# Altium PCB pcb.PcbDoc
Units mm, origin at the board's own origin, x right, y up, seen from the top; angles counter-clockwise.
Board outline 45.47 x 50.43 mm, 2 copper layers (Top Layer, Bottom Layer); 18 components, 17 nets, 85 pads, 6 vias.
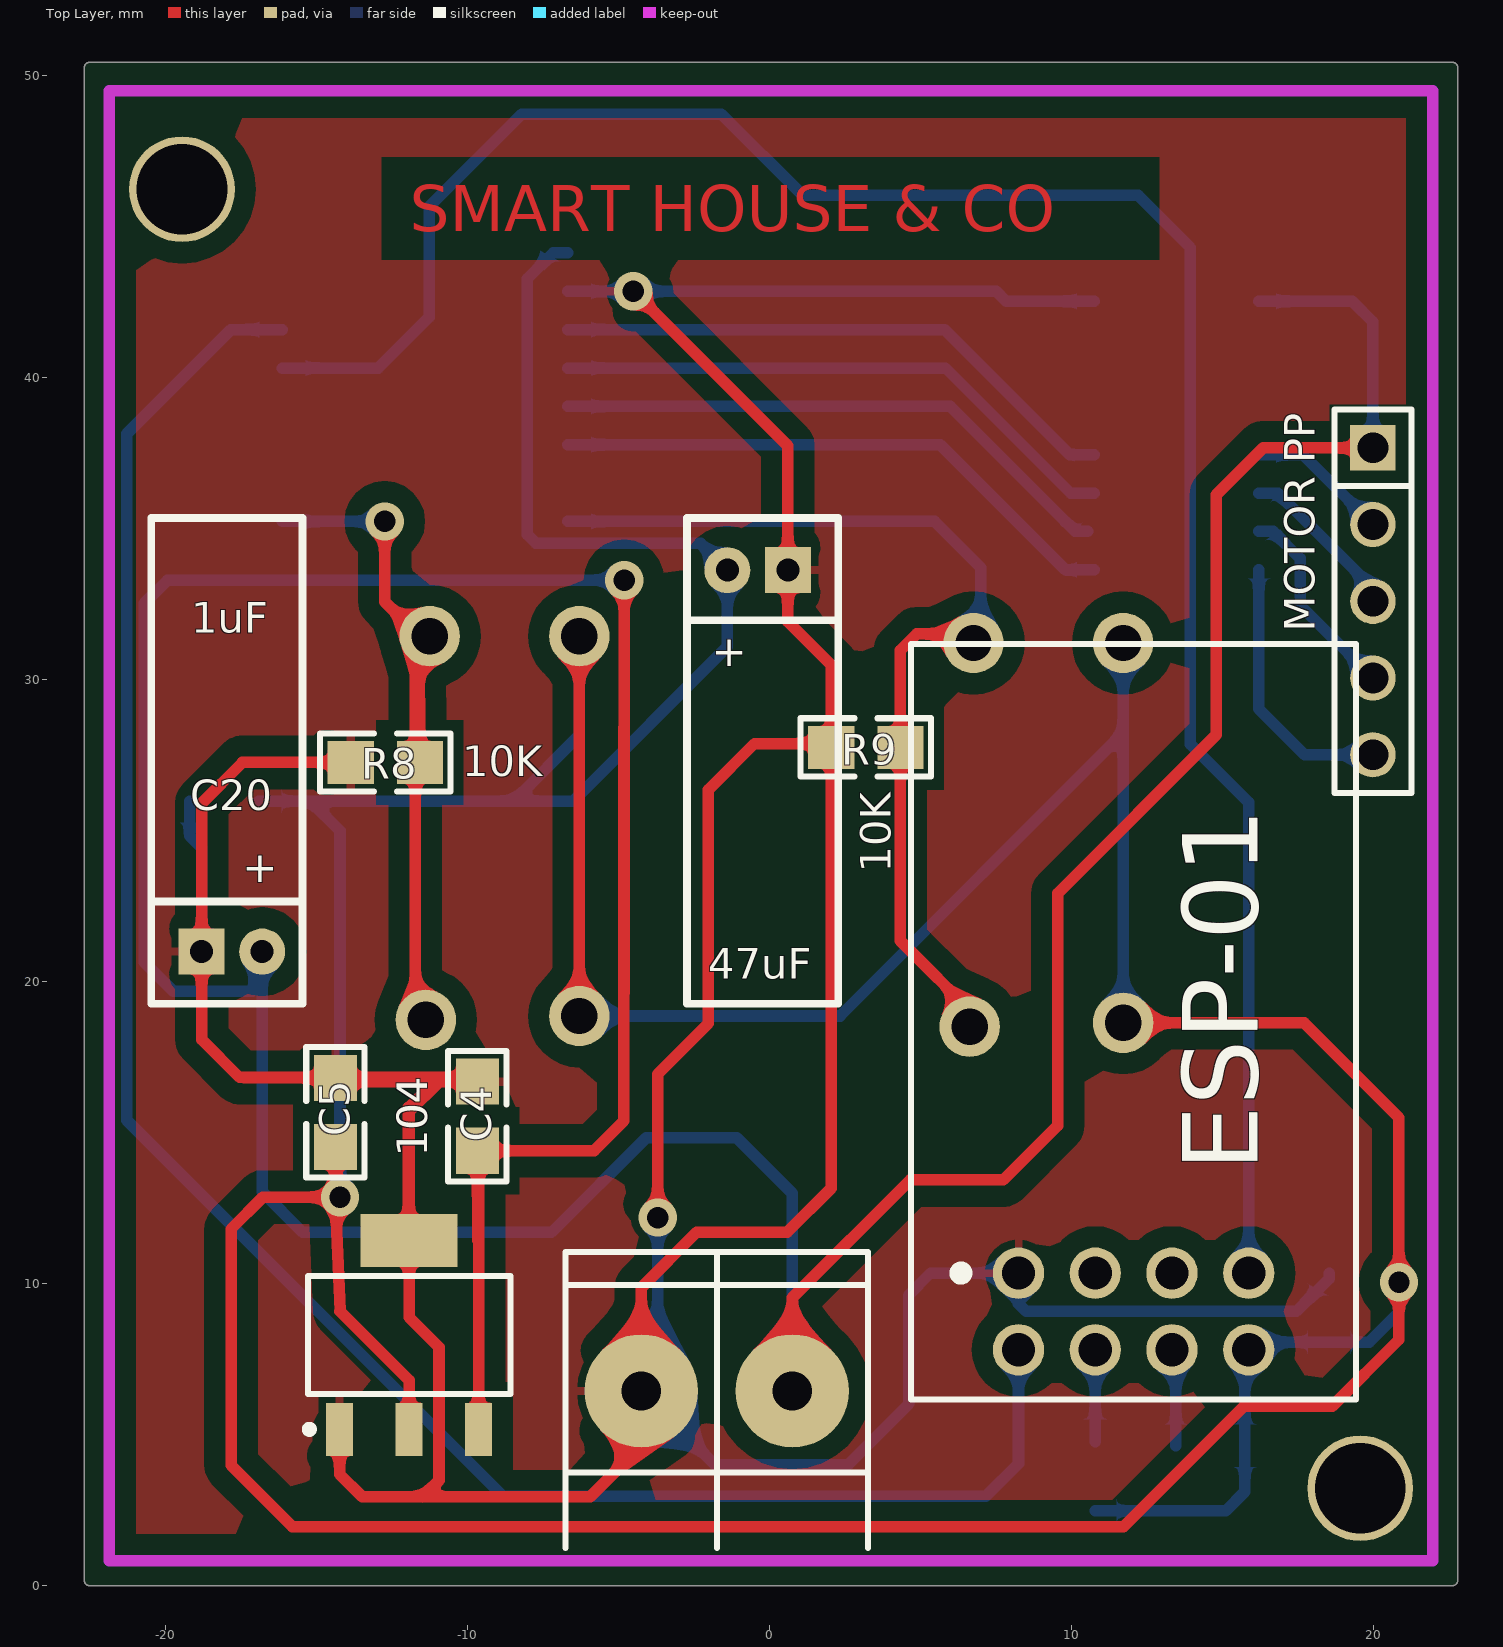
[diagram p0: Top Layer view]
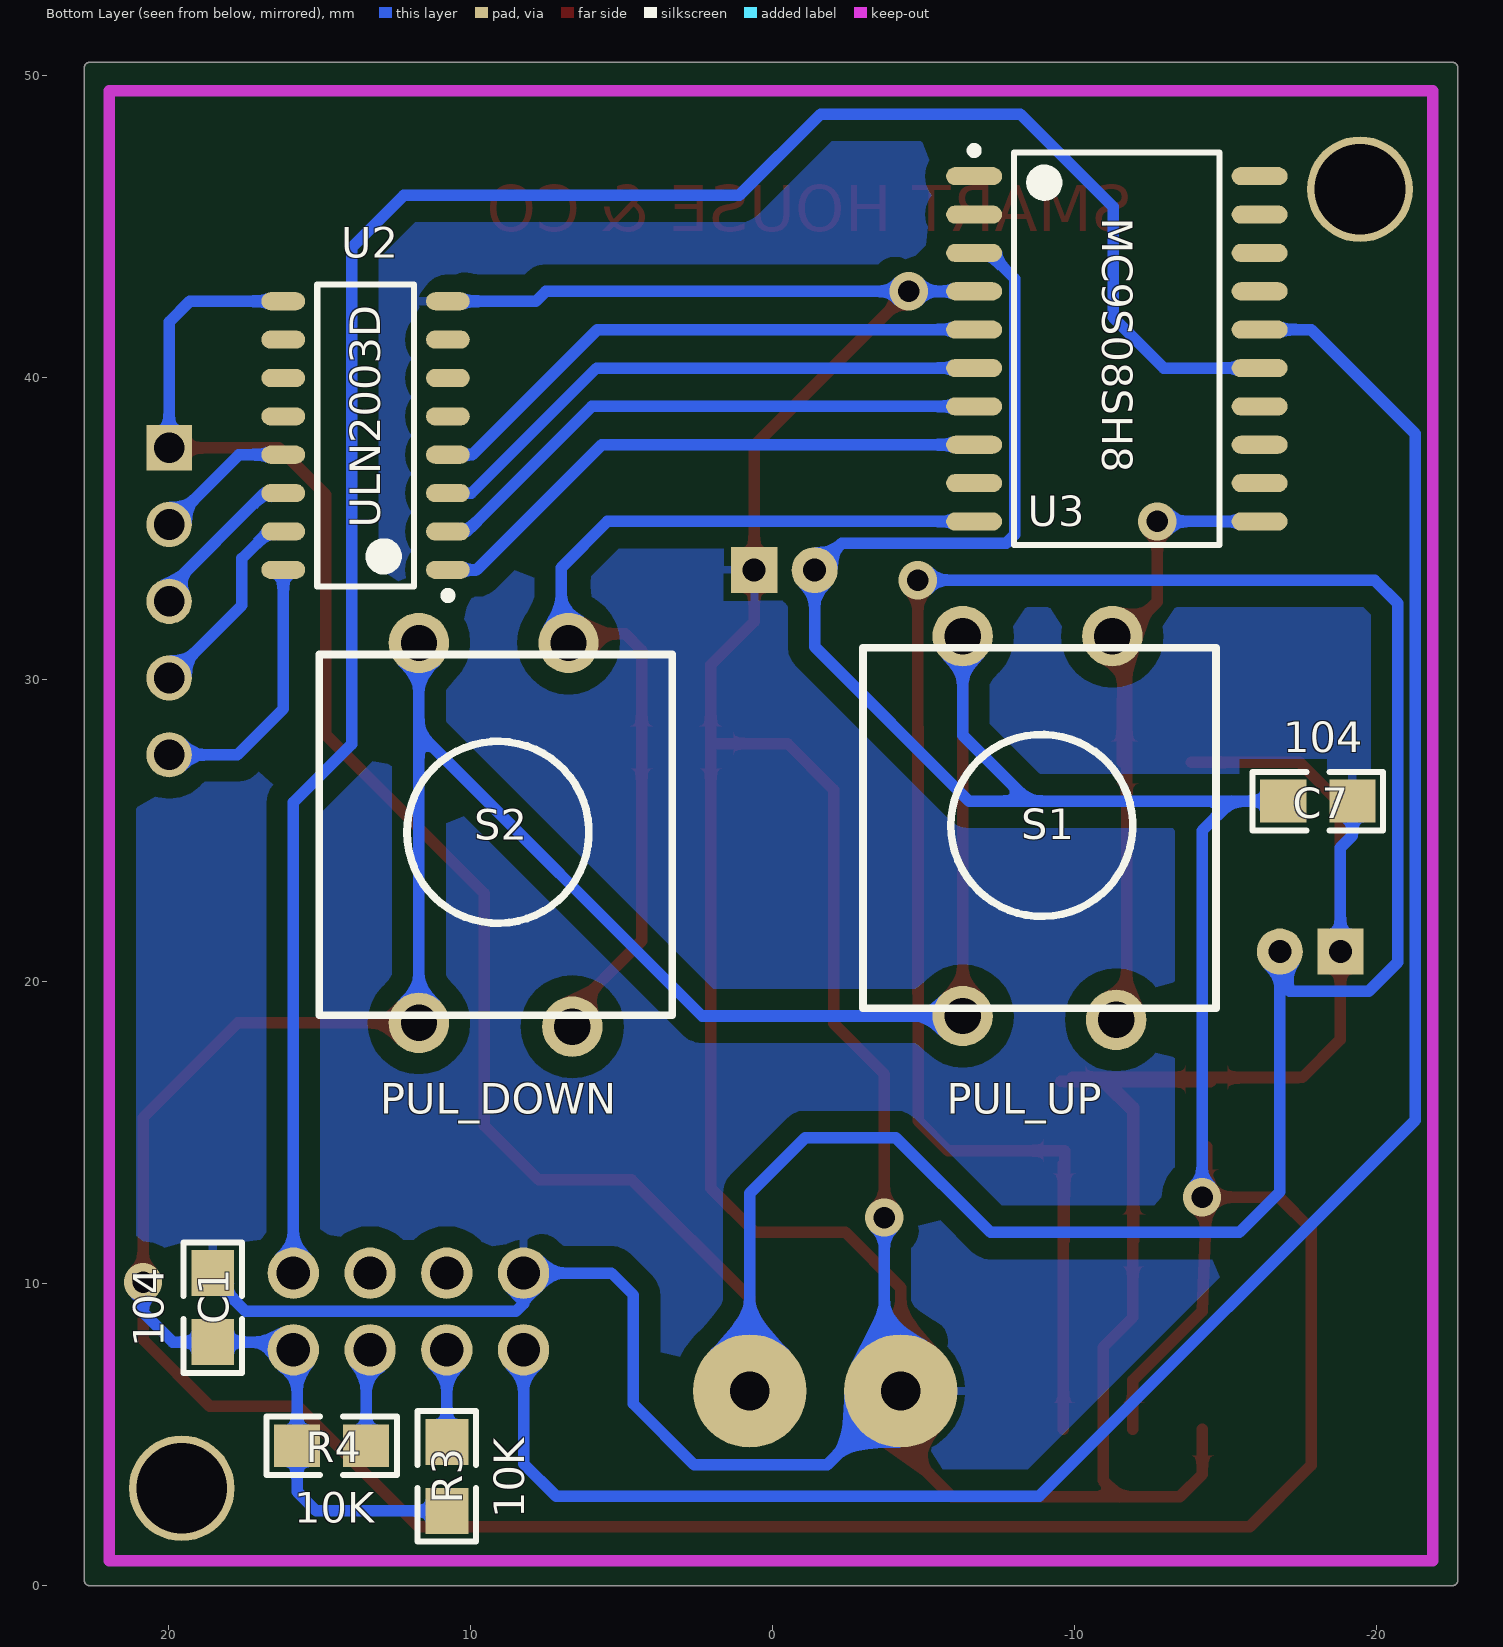
[diagram p1: Bottom Layer view, seen from below]

## Layer stack, top to bottom
Top Solder: solder mask 0.0102, Solder Resist, Dk 3.5
Top Layer: signal copper 0.0356
Dielectric 1: dielectric 0.32, FR-4, Dk 4.8
Bottom Layer: signal copper 0.0356
Bottom Solder: solder mask 0.0102, Solder Resist, Dk 3.5

## Board outline
-22.691,0.193 ccw(c-22.5,0.193) -22.5,0.002 22.5,0.002 ccw(c22.5,0.193) 22.543,0.007 ccw(c22.585,0.193) 22.776,0.193 22.776,50.241 ccw(c22.585,50.241) 22.585,50.432 -22.5,50.432 ccw(c-22.5,50.241) -22.691,50.241

## Design rules (kind name [scope] priority, off if disabled: settings)
Clearance POLYGON [All vs InPolygon] p1: gap=0.7
Clearance [All] p2: gap=0.2
PolygonConnect [All] p1: connectstyle=Relief reliefconductorwidth=0.254 reliefentries=4 polygonreliefangle="90 Angle" airgapwidth=0.254
RoutingVias [All] p1: holewidth=0.711 width=1.27 viastyle="Through Hole" minholewidth=0.711 minwidth=1.27 maxholewidth=0.711 maxwidth=1.27
SolderMaskExpansion [All] p1: expansion=0.102
UnpouredPolygon [All] p1: allowunpoured=FALSE
Width [All] p1: maxlimit=2 minlimit=0.254 preferedwidth=0.381 toplayer_maxwidth=0.508 minimp=50.000000 maximp=50.000000 favimp=50.000000
29 further rules are at their usual default settings.

## Classes and differential pairs
component class esq: C1 C4 C5 C7 C20 R3 R4 R8 R9 S1 S2 U2 U3 ""

## Components (designator, comment, footprint, x,y, rotation, side; value= is the part's Value field where it differs from the comment)
C1 "104" 0805 18.521,9.21 r270 bottom
C4 "104" 0805 -9.677,15.545 r90 top
C5 "104" 0805 -14.376,15.672 r90 top
C6 "47uF" CAP100RP -0.402,33.619 r0 top
C7 "104" 0805 -18.055,25.974 r0 bottom
C20 "1uF" CAP100RP -17.801,20.995 r180 top
J2 "MOTOR PP" SIP5 19.964,37.668 r270 top
J? "IN" BORNERA2 -1.753,6.452 r270 top
R3 "10K" 0805 10.774,3.622 r90 bottom
R4 "10K" 0805 14.584,4.638 r180 bottom
R8 "10K" 0805 -12.725,27.254 r180 top
R9 "10K" 0805 3.179,27.752 r180 top
S1 "PUL_UP" pul_grande -3,18.227 r90 bottom
S2 "PUL_DOWN" pul_grande 15,18 r90 bottom
U2 "ULN2003D" SOIC16 13.462,38.075 r0 bottom
U3 "MC9S08SH8" SH8 -11.405,40.945 r180 bottom
U5 "" ESP-01 8.234,7.813 r0 top
U6 "AMS1117" AMS1117 -11.938,8.306 r90 top

## Footprints (in the part's own frame and the unit in brackets; to place one, negate y for a bottom-side part, rotate by r counter-clockwise, add the part's x,y. Pads: shape width x height; smd on the part's side, far side on the other; paste and mask are expansions set on the pad)
0805 [mil] "Pasivo 0805"
  rect 60x56 smd: 1(-45,0) 2(45,0)
  silkscreen extent -85,-38 85,38, body extent -39,-24 39,25, height 15
AMS1117 [mm] "SOT223, 4-Leads, Body 6,50x7,00mm (avg), Pitch 2,30mm, IPC Medium Density"
  rect 1.75x0.9 smd: 1(-3.125,-2.3) 2(-3.125,2.3) 3(-3.125,0)
  rect 1.75x3.2 smd: 2(3.125,0)
  silkscreen extent -3.25,-3.35 1.95,3.42, body extent -3.48,-3.25 3.48,3.25, height 1.7
BORNERA2 [mm] "Bornera con Tornillos 5mm separaci�n"
  round 3.75 hole 1.3: 1(0,2.5) 2(0,-2.5)
  silkscreen extent -4.6,-5 5.2,5, body extent -3.76,-4.89 3.94,5.61, height 10
CAP100RP [mil] "Body diameter 5mm"
  round 60 hole 30: 1(-39.37,0)
  rect 60x60 hole 30: 2(39.37,0)
  silkscreen extent -92,-565 105,68, body extent -97,-566 107,-65, height 220
ESP-01 [mm]
  round 1.7 hole 1.1: 1(0,2.54) 2(2.54,2.54) 3(5.08,2.54) 4(7.62,2.54) 5(0,0) 6(2.54,0) 7(5.08,0) 8(7.62,0)
  silkscreen extent -3.56,-1.65 11.18,23.37, body extent -3.43,-1.52 11.07,23.28, height 14.88
pul_grande [mm]
  round 2 hole 1.2: 1(0.635,-3.302) 2(13.208,-3.302) 3(0.508,-8.382) 4(13.208,-8.255)
  silkscreen extent 0.89,-11.68 12.83,0, body extent 0.09,-11.71 13.89,0.29, height 7.3
SH8 [mm] "SOP, 20-Leads, Body 12,80x7,50mm, Pitch 1,27mm, IPC Medium Density"
  oval 1.85x0.6 smd: 1(-4.725,5.715) 2(-4.725,4.445) 3(-4.725,3.175) 4(-4.725,1.905) 5(-4.725,0.635) 6(-4.725,-0.635) 7(-4.725,-1.905) 8(-4.725,-3.175) 9(-4.725,-4.445) 10(-4.725,-5.715) 11(4.725,-5.715) 12(4.725,-4.445) 13(4.725,-3.175) 14(4.725,-1.905) 15(4.725,-0.635) 16(4.725,0.635) 17(4.725,1.905) 18(4.725,3.175) 19(4.725,4.445) 20(4.725,5.715)
  silkscreen extent -4.85,-6.5 3.4,6.69, body extent -3.8,-6.5 3.8,6.5, height 2.65
SIP5 [mm]
  rect 1.5x1.5 hole 1.016: 1(0,0)
  round 1.5 hole 1.016: 2(2.54,0) 3(5.08,0) 4(7.62,0) 5(10.16,0)
  silkscreen extent -1.27,-1.27 11.43,1.27, body extent -1.27,-1.27 11.43,1.27, height 8.38
SOIC16 [mm] "controlador de corriente"
  oval 1.45x0.6 smd: 1(-2.725,4.445) 2(-2.725,3.175) 3(-2.725,1.905) 4(-2.725,0.635) 5(-2.725,-0.635) 6(-2.725,-1.905) 7(-2.725,-3.175) 8(-2.725,-4.445) 9(2.725,-4.445) 10(2.725,-3.175) 11(2.725,-1.905) 12(2.725,-0.635) 13(2.725,0.635) 14(2.725,1.905) 15(2.725,3.175) 16(2.725,4.445)
  silkscreen extent -2.85,-5 1.6,5.42, body extent -2,-5 2,5, height 1.75

## Part data
C1 C4 C5 C7: library part CAP, "cap"
C6 C20: library part CAPPOL, "Cap polarizado"
J2: library part CON5
J?: library part Bornera_2, "Bornera de 2 pines"
R3 R4 R8 R9: library part RES, "Resistencia"
S1 S2: library part "TACT SWITCH"
U2: "Controlador de corriente"
U3: "Micro controlador"
U5: library part ESP-01

## Free pads (board coordinates)
  round 3.5 hole 3: 0(-19.454,46.229) 0(19.546,3.229)

## Via types
v1: diameter 1.27, hole 0.711, Top Layer to Bottom Layer, 6 vias

## Nets (pads, with @x,y where several pads share a name; then routed paths per layer and width w, separated by ;. In a path a pad name is that pad's centre, name@x,y a point inside that pad or via, vN(x,y) a via of type N, cw(c..) or ccw(c..) an arc to the next point about the centre after c; other vN are vias at no path point)
3V3: C1.2 C5.1 C6.1 C7.2 R3.1 R4.1 S1.1 S1.2 S2.1 S2.2 U3.3 U5.8 U6.3 | length 203
  Top Layer w0.381: C5.1 v1@-14.376,12.865 ; v1(-14.224,12.865) v1@-14.376,12.865 ; U6.3 -11.938,6.807 -14.224,9.093 -14.376,12.859 v1@-14.376,12.865 ; S1.1 S1.2 ; S2.1 17.687,18.635 20.828,15.494 v1(20.828,10.052) 20.828,8.153 18.618,5.944 15.697,5.944 11.709,1.956 -15.799,1.956 -17.831,3.988 -17.831,11.811 -16.777,12.865 v1@-14.376,12.865
  Bottom Layer w0.381: C7.2 -15.204,25.974 ; v1(-14.224,12.865) -14.224,24.994 -15.204,25.974 ; U3.3 -7.171,44.12 -8.019,43.271 -8.019,34.788 -7.74,34.508 -2.291,34.508 C6.1 -1.402,31.085 -6.513,25.974 -8.484,25.974 ; S1.1@-6.65,18.862 S1.1@-6.476,19.036 ; S1.1 2.326,18.862 11.698,28.233 ; S1.2 -6.302,28.155 -8.484,25.974 ; R3.1 15.092,2.479 15.727,3.114 R4.1 15.727,7.686 U5.8 16.108,8.067 C1.2 19.837,8.067 20.828,9.057 v1(20.828,10.052) ; S2.1 11.698,28.233 ; S2.2 11.698,28.233 ; -15.204,25.974 -8.484,25.974
5V: C4.1 C20.1 J2.1 J?.1 U2.9 U6.1 | length 164.2
  Top Layer w0.381: -9.659,11.446 -9.659,12.914 ; U6.1 -9.638,12.893 ; -4.819,19.634 -4.819,28.404 ; v1(-4.819,33.289) -4.819,28.404 ; J?.1 0.747,9.536 4.648,13.437 7.732,13.437 9.532,15.236 9.532,22.918 14.783,28.169 14.783,36.119 16.332,37.668 J2.1 ; -9.659,12.914 -9.638,12.893 ; -9.659,12.914 -9.677,12.932 C4.1 -5.817,14.402 -4.826,15.392 -4.826,28.397 -4.819,28.404 ; -9.659,12.914 -9.659,13.995 -9.638,13.974 -9.638,12.893
  Bottom Layer w0.381: v1(-4.819,33.289) -19.935,33.289 -20.703,32.521 -20.703,20.642 -19.741,19.68 -17.126,19.68 C20.1 -16.801,13.042 -15.456,11.697 -7.226,11.697 -4.089,14.834 -1.092,14.834 0.747,12.994 J?.1 ; U2.9 19.279,42.52 19.964,41.834 J2.1
GND: C1.1 C4.2 C5.2 C6.2 C7.1 C20.2 J?.2 R8.2 R9.2 U2.8 U3.4 U5.1 U6.2 | length 189.8
  Top Layer w0.381: C5.2 C5.2@-14.62,16.815 ; U6.2@-14.238,5.181 -14.238,3.697 -13.487,2.946 -11.493,2.946 ; R8.2 -17.455,27.254 ; U6.2@-11.959,11.446 -11.959,15.837 -11.108,16.688 ; -11.093,16.703 -11.108,16.688 ; C4.2 -10.937,16.688 ; C4.2@-9.546,16.703 -9.8,16.703 -9.927,16.83 C5.2@-14.635,16.83 ; v1(-4.514,42.85) 0.598,37.738 C6.2 0.598,31.918 2.036,30.48 R9.2 ; v1(-3.708,12.192) -3.708,16.942 -2.028,18.623 -2.028,26.355 -0.504,27.879 1.909,27.879 R9.2 ; -18.801,25.908 -17.455,27.254 ; -18.801,25.908 C20.2 -18.801,18.084 -17.547,16.83 -17.407,16.83 ; -18.801,25.908 -17.455,27.254 ; -17.407,16.83 C5.2@-14.635,16.83 ; -17.407,16.83 -17.392,16.815 C5.2@-14.62,16.815 ; C5.2@-14.635,16.83 C5.2@-14.62,16.815 ; C5.2@-14.62,16.815 -14.493,16.688 -11.108,16.688 ; -11.493,2.946 -5.944,2.946 -4.253,4.637 J?.2 -4.253,9.87 -2.413,11.709 0.584,11.709 2.036,13.162 R9.2 ; -11.493,2.946 -10.947,3.492 -10.947,7.899 -11.938,8.89 -11.938,11.431 -11.938,15.687 -10.937,16.688 ; -11.108,16.688 -10.937,16.688
  Bottom Layer w0.381: C7.1 -19.198,24.831 -18.801,24.434 C20.2 ; U3.4 v1(-4.514,42.85) 7.493,42.85 7.823,42.52 U2.8 ; v1(-3.708,12.192) -3.708,6.996 J?.2 -1.814,4.013 2.591,4.013 4.597,6.02 4.597,9.627 5.324,10.353 U5.1 8.234,9.337 8.488,9.083 17.431,9.083 18.521,10.172 C1.1
NetJ2_2: J2.2 U2.13 | length 4.7
  Bottom Layer w0.381: U2.13 17.653,37.44 J2.2
NetJ2_3: J2.3 U2.14 | length 5.5
  Bottom Layer w0.381: U2.14 16.815,36.17 19.964,33.02 J2.3
NetJ2_4: J2.4 U2.15 | length 6.7
  Bottom Layer w0.381: U2.15 16.662,34.9 17.555,34.007 17.555,32.458 J2.4
NetJ2_5: J2.5 U2.16 | length 9
  Bottom Layer w0.381: U2.16 16.187,29.025 17.704,27.508 J2.5
NetR3_2: R3.2 U5.6 | length 3
  Bottom Layer w0.381: R3.2 U5.6
NetR4_2: R4.2 U5.7 | length 3.2
  Bottom Layer w0.381: U5.7 13.441,7.686 R4.2
NetR8_1: R8.1 S1.3 S1.4 U3.11 | length 24.7
  Top Layer w0.381: v1(-12.744,35.23) -12.744,32.575 S1.4@-11.73,31.562 ; S1.3@-11.73,18.735 S1.4@-11.73,31.562 ; R8.1 -11.582,29.327 -11.603,29.347 -11.603,31.435 S1.4@-11.73,31.562
  Bottom Layer w0.381: U3.11 v1(-12.744,35.23)
NetR9_1: R9.1 S2.3 S2.4 U3.10 | length 32.6
  Top Layer w0.381: S2.3@6.862,18.811 4.322,21.351 R9.1 4.322,30.963 4.871,31.511 S2.4@6.989,31.511
  Bottom Layer w0.381: U3.10 5.461,35.23 6.989,33.701 S2.4@6.989,31.511
NetU2_1: U2.1 U3.8 | length 19.1
  Bottom Layer w0.381: U3.8 5.646,37.77 9.786,33.63 U2.1
NetU2_2: U2.2 U3.7 | length 18.9
  Bottom Layer w0.381: U3.7 5.969,39.04 10.109,34.9 U2.2@10.528,34.9
NetU2_3: U2.3 U3.6 | length 19.1
  Bottom Layer w0.381: U3.6 5.817,40.31 9.957,36.17 U2.3
NetU2_4: U2.4 U3.5 | length 19.1
  Bottom Layer w0.381: U3.5 5.791,41.58 9.931,37.44 U2.4
RXD: U3.15 U5.4 | length 72.3
  Bottom Layer w0.381: U3.15 -12.954,40.31 -11.278,41.986 -11.278,45.644 -8.204,48.717 -1.6,48.717 1.092,46.025 12.192,46.025 13.919,44.298 13.919,27.864 15.854,25.929 U5.4
TXD: U3.16 U5.5 | length 68.2
  Bottom Layer w0.381: U3.16 -17.839,41.58 -21.284,38.135 -21.284,15.415 -8.831,2.961 7.152,2.961 8.234,4.043 U5.5
pads on no net: U2.5 U2.6 U2.7 U2.10 U2.11 U2.12 U3.1 U3.2 U3.9 U3.12 U3.13 U3.14 U3.17 U3.18 U3.19 U3.20 U5.2 U5.3

## Polygon pours and split planes (outlines as drawn)
GND on Bottom Layer "POLYGON" (solid, remove dead copper, pour order 3): -23.952,50.902 20.752,50.902 22.555,52.705 25.273,49.987 25.273,-3.048 -26.721,-3.048 -29.362,-0.406
GND on Top Layer "POLYGON" (solid, remove dead copper, pour order 5): -26.797,50.902 -25.4,52.299 25.629,52.299 25.629,0.102 24.155,-1.372 24.105,-1.321 -27.432,-1.321

## Keep-outs
Keep-Out Layer:
  lines w0.381: -21.865,0.828 -21.865,49.479 21.95,49.479 21.95,0.828 -21.865,0.828

## Other copper
Top Layer:
  text "SMART HOUSE & CO" at -11.913,44.831 h1.52

## Silkscreen, mask and mechanical layers (free items; w line width, h text height)
Mechanical 15:
  lines w0.381: 22.5,0.193 -22.5,0.193 -22.5,50.241 22.585,50.241 22.585,0.193

## Text inside footprints (layer, text, board x,y; h text height)
C6: Top Overlay "+" at -1.926,30.444 h1.02
C20: Top Overlay "+" at -16.277,24.17 h1.02 r180
U5: Top Overlay "ESP-01" at 16.154,13.716 h2.5 r90